# Allegro board fp_01v2.brd
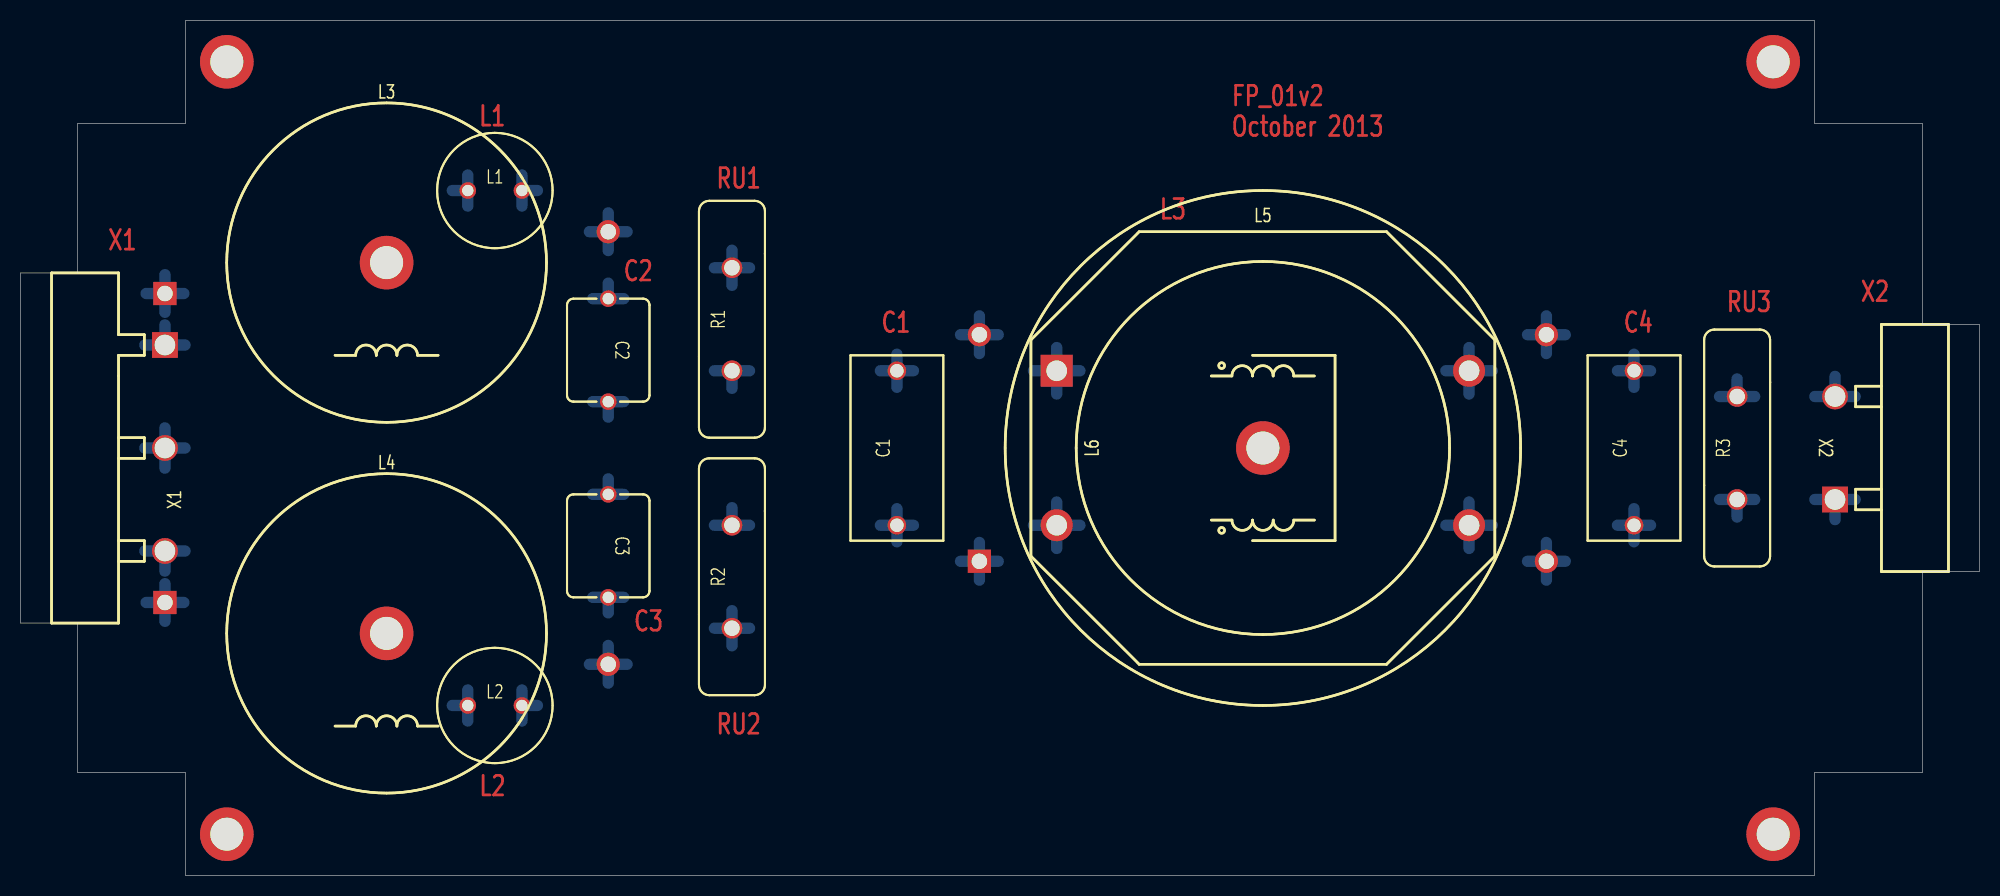
[diagram p0: board, top side]
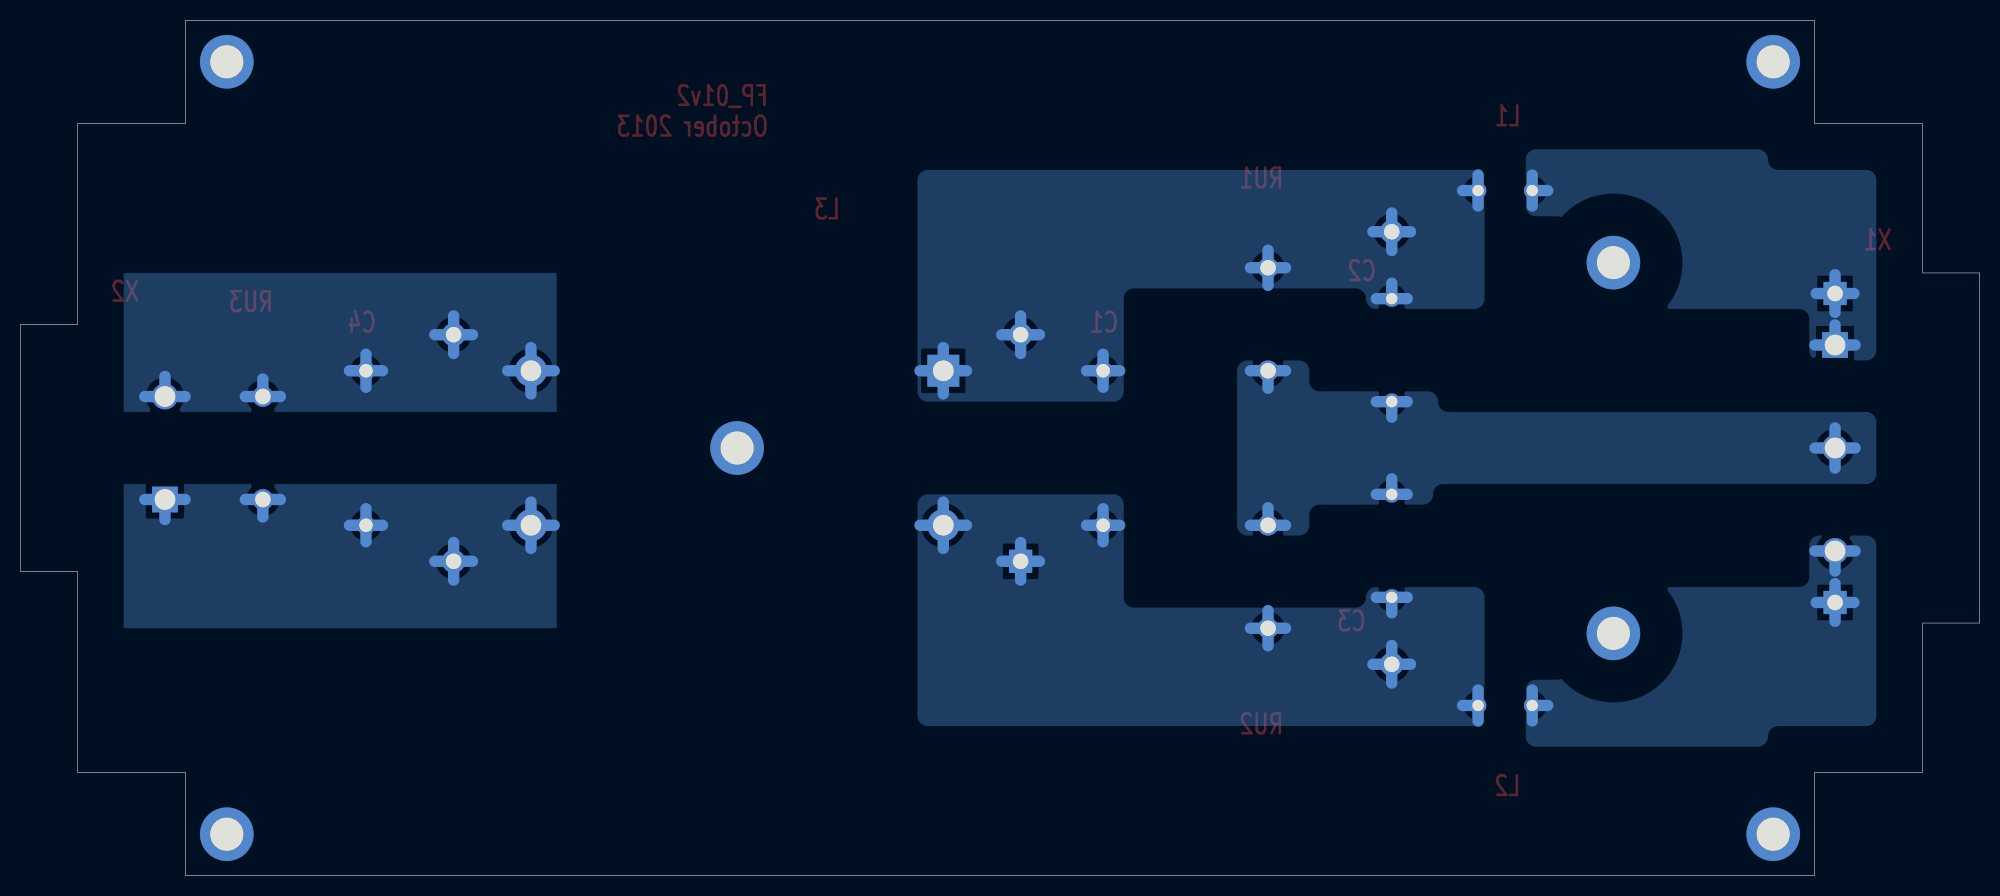
[diagram p1: board, bottom side, seen from below]

Outline 190 x 83 mm; copper layers: TOP, BOTTOM. Coordinates in mm from the lower left corner of the outline.
Outline path: 0,58.5 5.5,58.5 5.5,73 16,73 16,83 174,83 174,73 184.5,73 184.5,53.5 190,53.5 190,29.5 184.5,29.5 184.5,10 174,10 174,0 16,0 16,10 5.5,10 5.5,24.5 0,24.5 0,58.5

## Placement (name value [footprint] x y rotation side)
C1  0.47u  [CAPRR1500W80L1800T900H1800USR]  85 41.5 90 top
C2  2200p  [CAPRR1000W62L1000T800H1500USR]  57 51 270 top
C3  2200p  [CAPRR1000W62L1000T800H1500USR]  57 32 270 top
C4  0.47u  [CAPRR1500W80L1800T900H1800USR]  156.5 41.5 90 top
L1  22u  [INDRD525W65D1120H1250USR]  46 66.5 0 top
L2  22u  [INDRD525W65D1120H1250USR]  46 16.5 0 top
L3  10u  [PROSOFT_DR_FP_1V0#2]  35.5 59.5 0 top
L4  10u  [PROSOFT_DR_FP_1V0]  35.5 23.5 0 top
L5  B82725A  [FIL_B82725A]  120.5 41.5 0 top
L6  2x50u  [PROSOFT_DR_FP_2V0]  120.5 41.5 90 top
NOREF  -  [unnamed]  170 4 0 top
NOREF#2  -  [unnamed]  20 4 0 top
NOREF#3  -  [unnamed]  170 79 0 top
NOREF#4  -  [unnamed]  20 79 0 top
RU1  390  [VARR1000W100L2300T640H2850USR]  69 54 90 top
RU2  390  [VARR1000W100L2300T640H2850USR]  69 29 90 top
RU3  390  [VARR1000W100L2300T640H2850USR]  166.5 41.5 90 top
X1  DG58R  [DEGSON_DG58R_B_03]  14 31.5 90 top
X2  DG58R  [DEGSON_DG58R_B_02]  176 46.5 270 top

## Library data of the parts
C1-C4 = CAP_NP
L1-L4 = INDUCTOR
L5 = B82725A
L6 = DR_FP_2v0
RU1-RU3 = VAR
X1 = CON_3
X2 = CON_2

## Footprints (pads in the part's own frame, mm; a bottom-side part is the same pattern mirrored in y, then rotated)
CAPRR1000W62L1000T800H1500USR
  round 1.6 hole 1.1: 1(-5,0) 2(5,0)
CAPRR1500W80L1800T900H1800USR
  round 1.8 hole 1.3: 1(-7.5,0) 2(7.5,0)
DEGSON_DG58R_B_02
  rect 2.5x2.5 hole 2: 1(10,0)
  round 2.5 hole 2: 2(0,0)
DEGSON_DG58R_B_03
  rect 2.5x2.5 hole 2: 1(20,0)
  round 2.5 hole 2: 2(10,0) 3(0,0)
FIL_B82725A
  rect 3.1x3.1 hole 2: 1(-20,7.5)
  round 3.1 hole 2: 2(20,7.5) 3(20,-7.5) 4(-20,-7.5)
INDRD525W65D1120H1250USR
  round 1.6 hole 1.1: 1(-2.625,0) 2(2.625,0)
PROSOFT_DR_FP_1V0
  round 5.2 hole 3.2: (0,0)
  rect 2.25x2.25 hole 1.5: 1(-21.5,3)
  round 2.25 hole 1.5: 2(21.5,-3)
PROSOFT_DR_FP_1V0#2
  round 5.2 hole 3.2: (0,0)
  rect 2.25x2.25 hole 1.5: 1(-21.5,-3)
  round 2.25 hole 1.5: 2(21.5,3)
PROSOFT_DR_FP_2V0
  round 5.2 hole 3.2: (0,0)
  rect 2.25x2.25 hole 1.5: 1(-11,27.5)
  round 2.25 hole 1.5: 2(-11,-27.5) 3(11,27.5) 4(11,-27.5)
unnamed
  round 5.2 hole 3.2: (0,0)
VARR1000W100L2300T640H2850USR
  round 2 hole 1.5: 1(-5,0) 2(5,0)

## Nets
1L_IN: C1.2 C2.1 L1.2 L3.2 L5.1 L6.3 RU1.2
1N_IN: C1.1 C3.2 L2.2 L4.2 L5.4 L6.1 RU2.1
L_IN: L1.1 L3.1 X1.1
L_OUT: C4.2 L5.2 L6.4 RU3.2 X2.2
N_IN: L2.1 L4.1 X1.3
N_OUT: C4.1 L5.3 L6.2 RU3.1 X2.1
PE: C2.2 C3.1 RU1.1 RU2.2 X1.2

## Routing (per net, layer and track width the routed paths; a pad name or vN(x,y) marks a point on that pad's centre or on a via; arc(x,y) is an arc through that point)
1L_IN: length 45.9
  BOTTOM w1.1: 91.17,52.5 L6.3 ; L6.3 94.83,52.5 ; L6.3 93,50.67 ; L6.3 93,54.33 ; L3.2 57,64.33 ; L3.2 55.17,62.5 ; L3.2 57,60.67 ; L3.2 58.83,62.5 ; 100.5,46.75 L5.1 ; L5.1 98.25,49 ; L5.1 102.75,49 ; L5.1 100.5,51.25 ; L1.2 50.13,66.5 ; L1.2 48.62,68 ; L1.2 48.62,65 ; 55.5,56 C2.1 ; C2.1 58.5,56 ; C2.1 57,57.5 ; RU1.2 70.7,59 ; RU1.2 69,57.3 ; RU1.2 67.3,59 ; RU1.2 69,60.7 ; C1.2 85,50.6 ; C1.2 85,47.4 ; C1.2 83.4,49 ; C1.2 86.6,49
1N_IN: length 45.9
  BOTTOM w1.1: 85,32.4 C1.1 ; C1.1 86.6,34 ; C1.1 83.4,34 ; C1.1 85,35.6 ; L2.2 50.13,16.5 ; L2.2 48.62,18 ; L2.2 48.62,15 ; L5.4 100.5,36.25 ; L5.4 102.75,34 ; L5.4 98.25,34 ; L5.4 100.5,31.75 ; 57,18.67 L4.2 ; L4.2 57,22.33 ; L4.2 55.17,20.5 ; L4.2 58.83,20.5 ; 91.17,30.5 L6.1 ; L6.1 94.83,30.5 ; L6.1 93,32.33 ; L6.1 93,28.67 ; 57,25.5 C3.2 ; C3.2 55.5,27 ; C3.2 58.5,27 ; 67.3,24 RU2.1 ; RU2.1 69,25.7 ; RU2.1 69,22.3 ; RU2.1 70.7,24
L_IN: length 17.7
  BOTTOM w1.1: 43.38,65 L1.1 ; L1.1 41.87,66.5 ; L1.1 43.38,68 ; X1.1 14,53.45 ; X1.1 12.05,51.5 ; X1.1 15.95,51.5 ; L3.1 14,58.33 ; L3.1 15.83,56.5 ; L3.1 12.17,56.5 ; L3.1 14,54.67
L_OUT: length 33.7
  BOTTOM w1.1: 156.5,47.4 C4.2 ; C4.2 156.5,50.6 ; C4.2 154.9,49 ; C4.2 158.1,49 ; L5.2 142.75,49 ; L5.2 140.5,51.25 ; L5.2 140.5,46.75 ; L5.2 138.25,49 ; 174.05,46.5 X2.2 ; X2.2 177.95,46.5 ; X2.2 176,48.45 ; L6.4 149.83,52.5 ; L6.4 146.17,52.5 ; L6.4 148,54.33 ; L6.4 148,50.67 ; RU3.2 166.5,48.2 ; RU3.2 168.2,46.5 ; RU3.2 164.8,46.5
N_IN: length 17.7
  BOTTOM w1.1: X1.3 15.95,31.5 ; X1.3 14,29.55 ; X1.3 12.05,31.5 ; L4.1 14,28.33 ; L4.1 15.83,26.5 ; L4.1 12.17,26.5 ; L4.1 14,24.67 ; 41.87,16.5 L2.1 ; L2.1 43.38,15 ; L2.1 43.38,18
N_OUT: length 33.7
  BOTTOM w1.1: 156.5,32.4 C4.1 ; C4.1 158.1,34 ; C4.1 154.9,34 ; C4.1 156.5,35.6 ; 174.05,36.5 X2.1 ; X2.1 176,34.55 ; X2.1 177.95,36.5 ; 140.5,31.75 L5.3 ; L5.3 138.25,34 ; L5.3 140.5,36.25 ; L5.3 142.75,34 ; L6.2 149.83,30.5 ; L6.2 148,28.67 ; L6.2 146.17,30.5 ; L6.2 148,32.33 ; RU3.1 168.2,36.5 ; RU3.1 164.8,36.5 ; RU3.1 166.5,34.8
PE: length 27
  BOTTOM w1.1: 69,47.3 RU1.1 ; RU1.1 70.7,49 ; RU1.1 67.3,49 ; 67.3,34 RU2.2 ; RU2.2 69,35.7 ; RU2.2 70.7,34 ; X1.2 15.95,41.5 ; X1.2 14,43.45 ; X1.2 14,39.55 ; X1.2 12.05,41.5 ; C3.1 58.5,37 ; C3.1 57,38.5 ; C3.1 55.5,37 ; 55.5,46 C2.2 ; C2.2 57,44.5 ; C2.2 58.5,46

## Copper pours and planes (outline as drawn; the poured copper is in the pictures)
1L_IN on BOTTOM: 48,67.5 48.29,68.21 49,68.5 102,68.5 102.71,68.21 103,67.5 103,47 102.71,46.29 102,46 84,46 83.29,46.29 83,47 83,56 82.71,56.71 82,57 60.5,57 59.79,56.71 59.21,55.29 58.5,55 49,55 48.29,55.29 48,56
1N_IN on BOTTOM: 48,27 48.29,27.71 49,28 58.5,28 59.21,27.71 59.79,26.29 60.5,26 82,26 82.71,26.29 83,27 83,36 83.29,36.71 84,37 102,37 102.71,36.71 103,36 103,15.5 102.71,14.79 102,14.5 49,14.5 48.29,14.79 48,15.5
L_IN on BOTTOM: 10,51 10.29,50.29 11,50 15.5,50 16.21,50.29 16.5,51 16.5,54 16.79,54.71 17.5,55 39,55 39.71,55.29 40,56 40,63 40.29,63.71 41,64 43,64 43.71,64.29 44,65 44,69.5 43.71,70.21 43,70.5 21.5,70.5 20.79,70.21 20.21,68.79 19.5,68.5 11,68.5 10.29,68.21 10,67.5
L_OUT on BOTTOM: 138,58.5 180,58.5 180,45 138,45
N_IN on BOTTOM: 10,32 10.29,32.71 11,33 15.5,33 16.21,32.71 16.5,32 16.5,29 16.79,28.29 17.5,28 39,28 39.71,27.71 40,27 40,20 40.29,19.29 41,19 43,19 43.71,18.71 44,18 44,13.5 43.71,12.79 43,12.5 21.5,12.5 20.79,12.79 20.21,14.21 19.5,14.5 11,14.5 10.29,14.79 10,15.5
N_OUT on BOTTOM: 138,38 180,38 180,24 138,24
PE on BOTTOM: 72,34 71.71,33.29 71,33 66,33 65.29,33.29 65,34 65,35 64.71,35.71 64,36 54,36 53.29,36.29 52.71,37.71 52,38 11,38 10.29,38.29 10,39 10,44 10.29,44.71 11,45 51.5,45 52.21,45.29 52.79,46.71 53.5,47 64,47 64.71,47.29 65,48 65,49 65.29,49.71 66,50 71,50 71.71,49.71 72,49

## Text on the board
TOP: X1 | L1 | L2 | C2 | C3 | RU1 | RU2 | C1 | L3 | October 2013 | FP_01v2 | C4 | RU3 | X2
User.6: FIGURE | SIZE | 1.1 | 1.3 | 1.5 | 2.0 | 3.2 | DRILL CHART: TOP to BOTTOM | ALL UNITS ARE IN MILLIMETERS | PLATED | QTY | 8 | 4 | 14 | 9 | 7
